# Altium PCB shield_boardPCB.PcbDoc
Units mil, origin at the board's own origin, x right, y up, seen from the top; angles counter-clockwise.
Board outline 2700 x 2100 mil, 2 copper layers (Top Layer, Bottom Layer), stack 62.8 mil thick; 15 components, 31 nets, 60 pads, 20 vias.
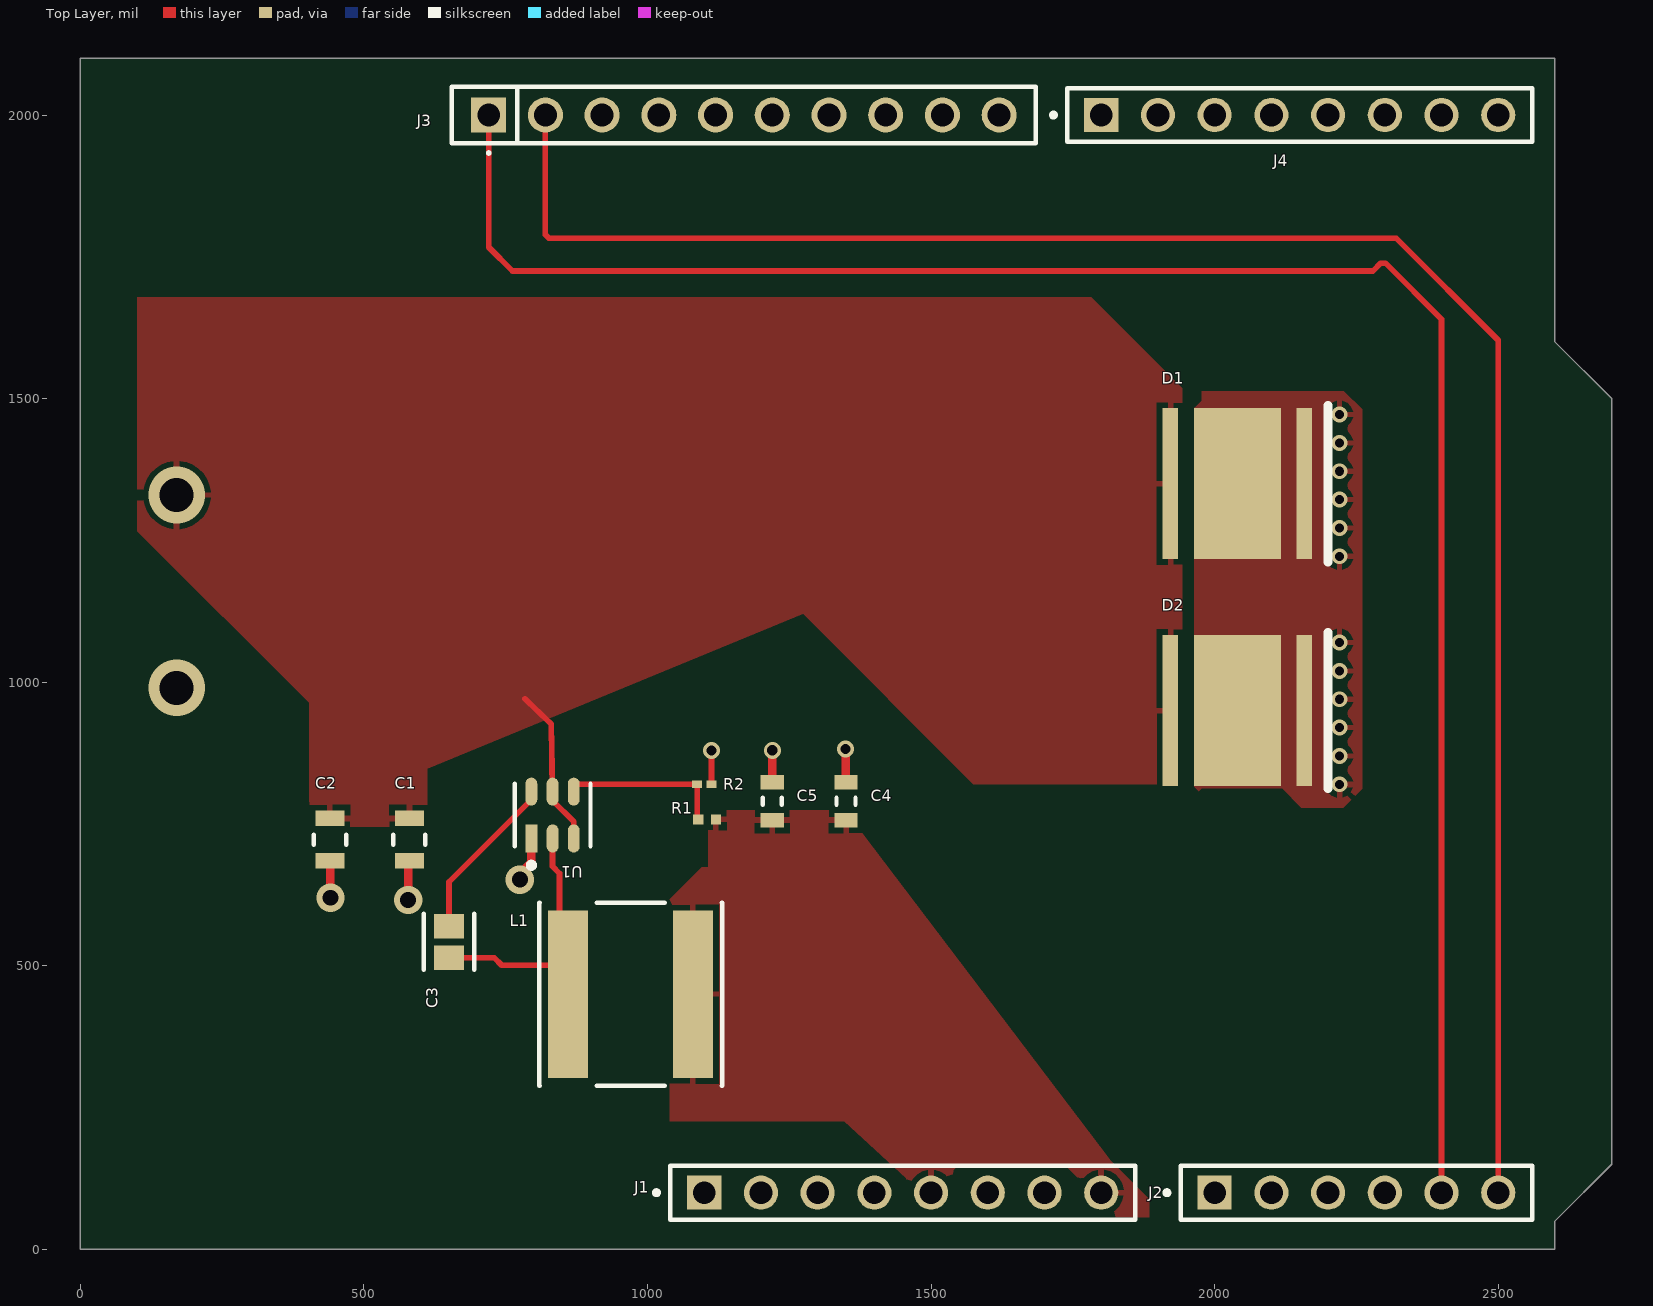
[diagram p0: Top Layer view]
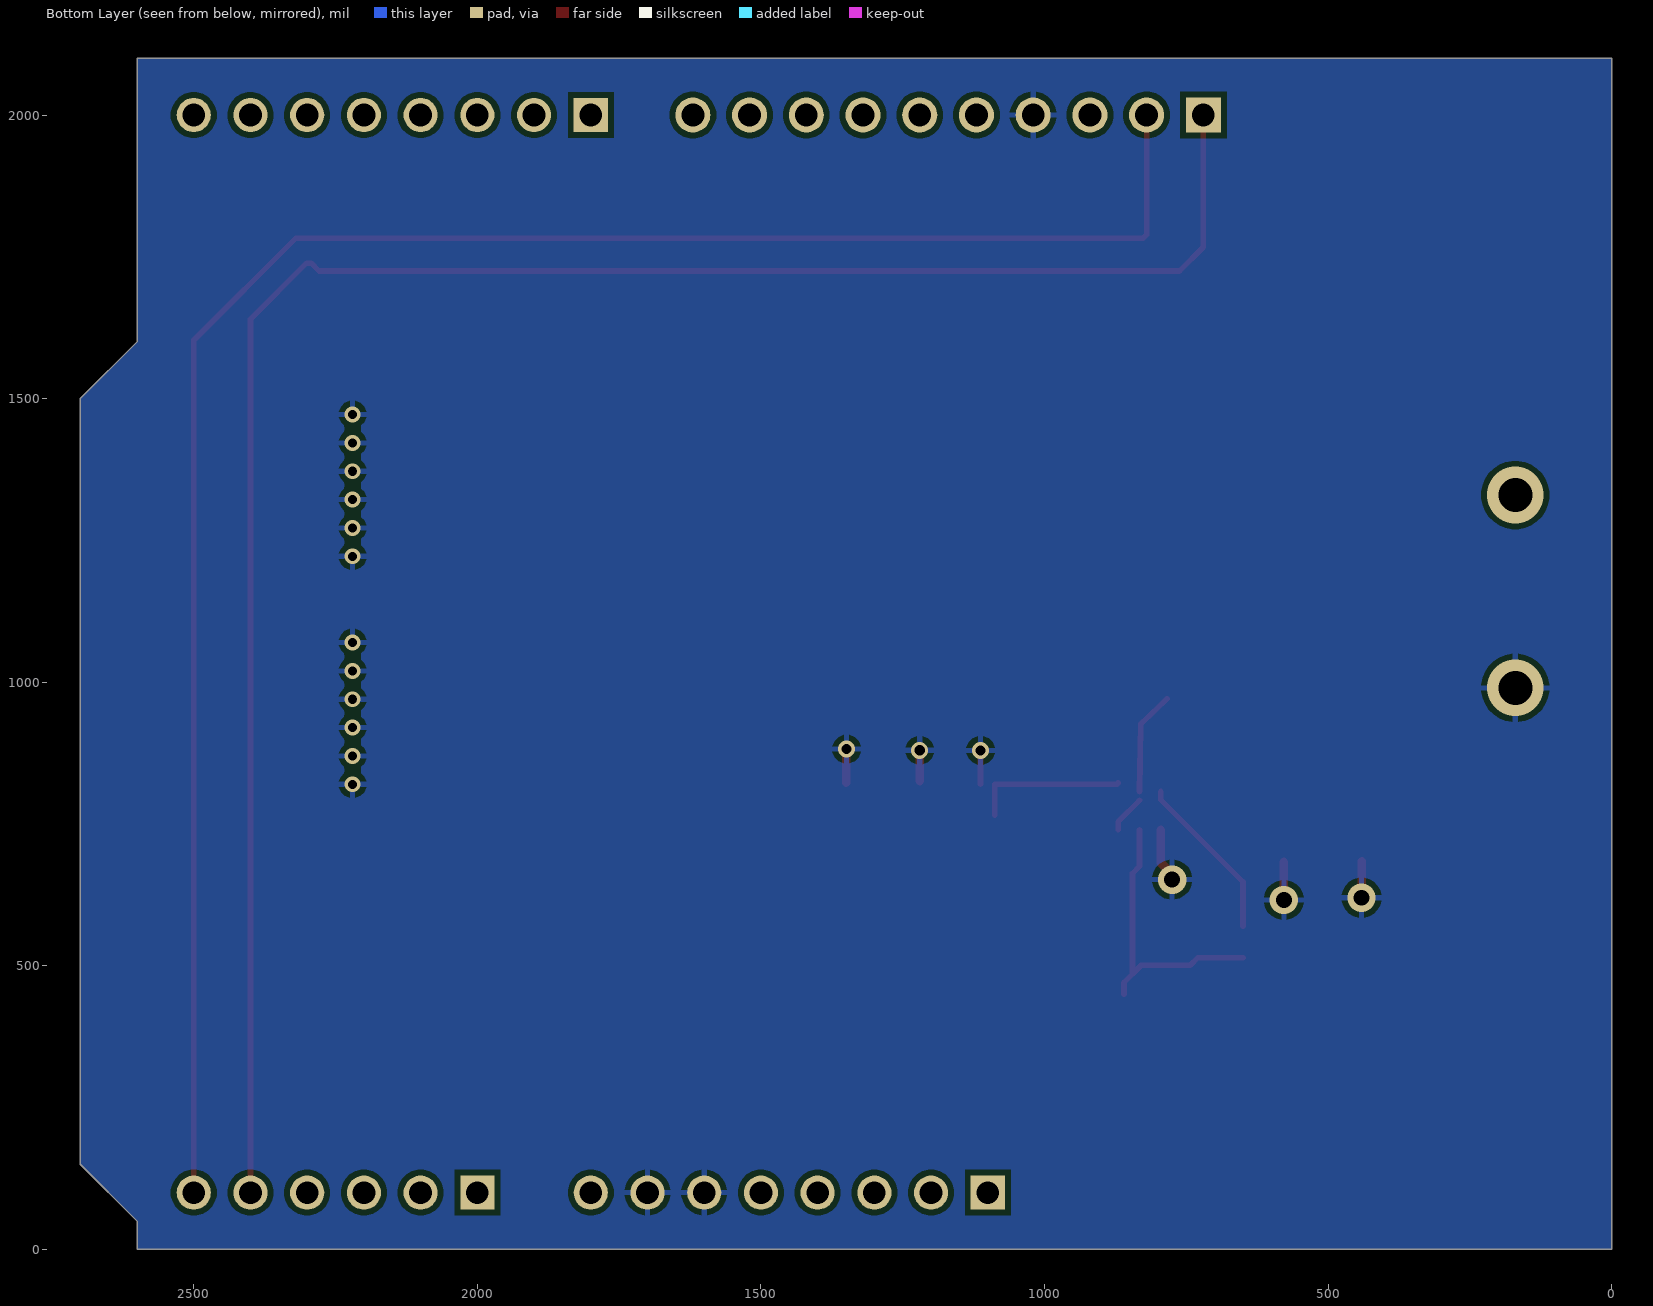
[diagram p1: Bottom Layer view, seen from below]
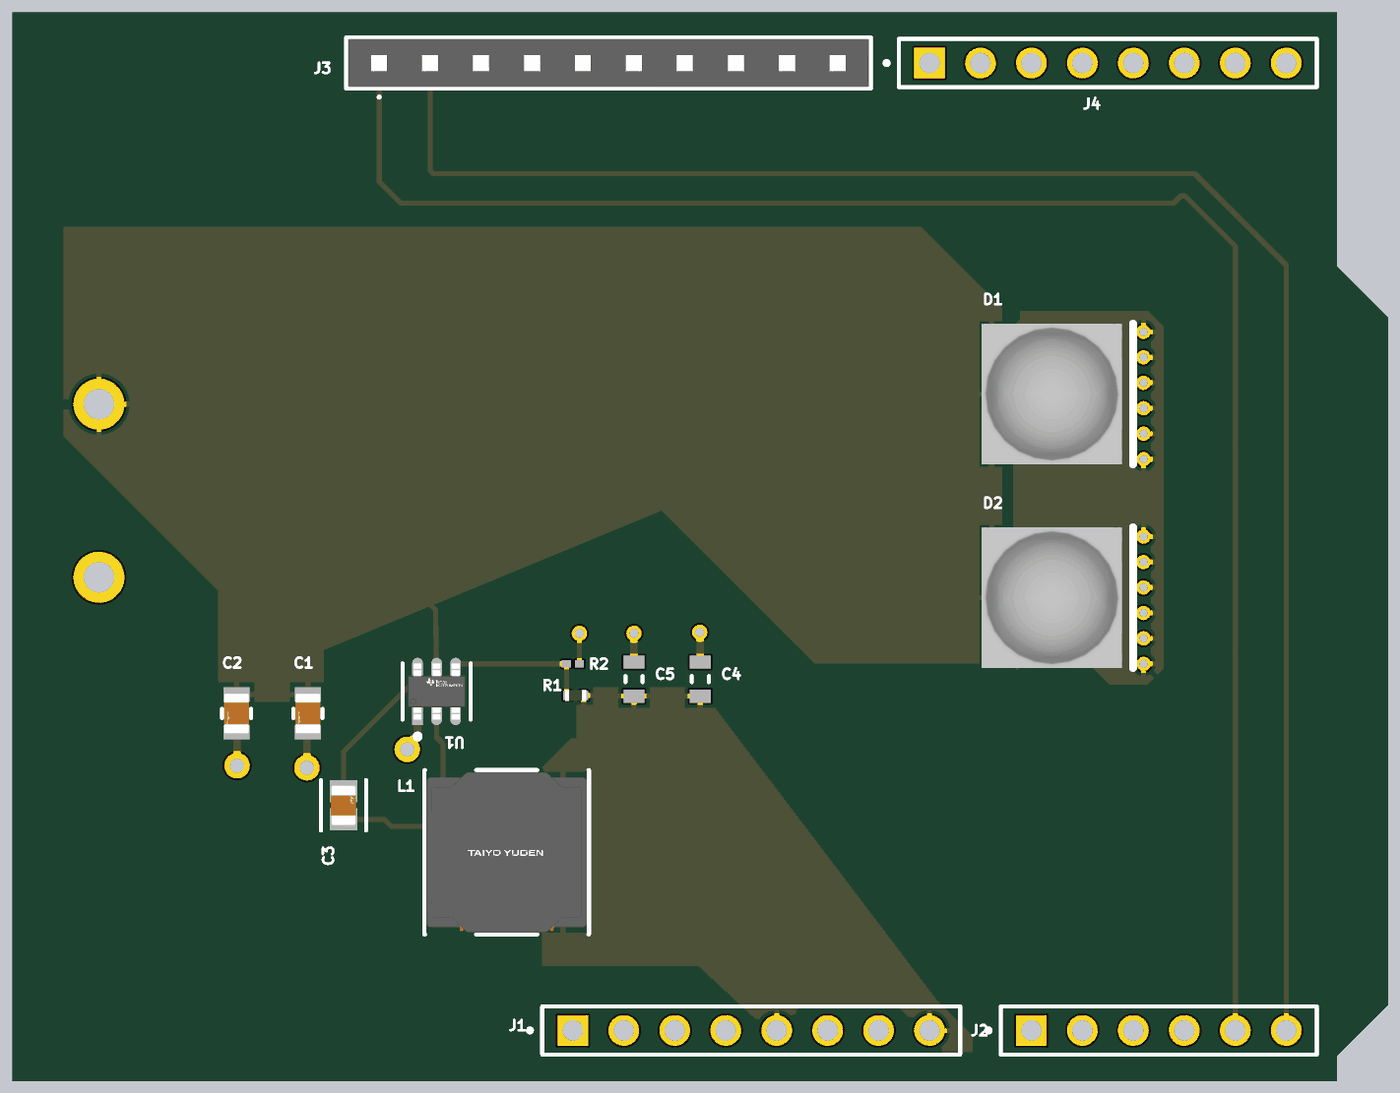
[diagram p2: 3D render of the assembled board from above, using the file's embedded part models]

## Layer stack, top to bottom
Top Solder: solder mask 0.4, Solder Resist, Dk 3.5
Top Layer: signal copper 1.4
Dielectric 1: dielectric 60, FR-4, Dk 4.8
Bottom Layer: signal copper 1.4
Bottom Solder: solder mask 0.4, Solder Resist, Dk 3.5

## Board outline
0,0 0,2100 2600,2100 2600,1600 2700,1500 2700,150 2600,50 2600,0

## Design rules (kind name [scope] priority, off if disabled: settings)
Clearance [InNet('+12')] p1: gap=10 ignorepadtopadclearanceinfootprint=TRUE except(5: Region-Region)
PolygonConnect [All] p1: connectstyle=Relief reliefconductorwidth=10 reliefentries=4 polygonreliefangle="90 Angle" airgapwidth=10
RoutingVias [All] p1: holewidth=28 width=50 viastyle="Through Hole" minholewidth=28 minwidth=50 maxholewidth=28 maxwidth=50
SolderMaskExpansion [All] p1: expansion=4 istentingtop=FALSE
SupplyNets "Schematic Supply Nets_2" [InNet('+5')] p1: voltage=0.000
SupplyNets "Schematic Supply Nets_1" [InNet('+12')] p2: voltage=0.000
SupplyNets "Schematic Supply Nets" [InNet('GND')] p3: voltage=0.000
Width [All] p1: maxlimit=40 minlimit=10 preferedwidth=10
30 further rules are at their usual default settings.

## Components (designator, comment, footprint, x,y, rotation, side; value= is the part's Value field where it differs from the comment)
C1 "Cin" FP-GRM21B-0_2-e0_2_0_7-MFG 580,722.6 r270 top
C2 "Cin" FP-GRM21B-0_2-e0_2_0_7-MFG 440,722.6 r270 top
C3 "Cbst" FP-0805-L_2_01_0_2-W_1_25-IPC_C 650,542.21 r90 top
C4 "Cout" CAPC1608X100X20ML10 1350,790 r270 top
C5 "Cout" CAPC1608X100X20ML10 1220,790 r270 top
D1 "MKRAWT-00-0000-0D0HG235H" CREE-MK-R-2_V 2040,1350 r0 top
D2 "MKRAWT-00-0000-0D0HG235H" CREE-MK-R-2_V 2040,950 r0 top
J1 "8-pin header" SAMTEC_SSQ-108-03-X-S 1450,100 r180 top
J2 "1x6 Header" SAMTEC_SSQ-106-03-X-S 2250,100 r180 top
J3 "10-pin Header" FP-SSQ-110-03-T-S-MFG 1170,2000 r0 top
J4 "8-pin Header" SAMTEC_SSQ-108-03-X-S 2150,2000 r180 top
L1 "NRS8030T3R3MJGJ" FP-NRS8030-MFG 970.24,450 r0 top
R1 "Rfbt" RESC1005X40X25LL05T05 1105.25,758 r0 top
R2 "Rbff" RESC0603X28X15NL05T05 1100,820 r180 top
U1 "TPS562201DDCR" FP-DDC0006A-IPC_C 832.6,765.81 r90 top

## Footprints (in the part's own frame and the unit in brackets; to place one, negate y for a bottom-side part, rotate by r counter-clockwise, add the part's x,y. Pads: shape width x height; smd on the part's side, far side on the other; paste and mask are expansions set on the pad)
CAPC1608X100X20ML10 [mm] "Chip Capacitor, 2-Leads, Body 1.70x0.90mm, IPC Low Density"
  rect 0.65x1.05 smd: 1(-0.85,0) 2(0.85,0)
  silkscreen extent -0.15,-0.43 0.15,0.43, body extent -0.85,-0.45 0.85,0.45, height 1
CREE-MK-R-2_V [mm] "SMD, 2-Leads, Body 7x7mm, Thermal Pad 3.9x6.76mm"
  rect 0.7x6.76 smd: 1(-3,0) 2(3,0)
  rect 3.9x6.76 smd: 3(0,0)
  silkscreen extent 4.05,-3.5 4.05,3.5, body extent -3.5,-3.5 3.5,3.5, height 4.1
FP-0805-L_2_01_0_2-W_1_25-IPC_C [mil]
  rect 43.49x53.39 smd paste+0 mask+0: 1(-27.79,0) 2(27.79,0)
  silkscreen extent -50,-44 50,44, body extent -53,-32 53,32, height 10
FP-DDC0006A-IPC_C [mm]
  rect 1.254x0.532 smd paste+0 mask+0: 1(-1.05,0.95)
  rrect100% 1.254x0.532 smd paste+0 mask+0: 2(-1.05,0) 3(-1.05,-0.95) 4(1.05,-0.95) 5(1.05,0) 6(1.05,0.95)
  silkscreen extent -2.37,-1.7 1.4,1.7, body extent -1.78,-1.55 1.78,1.55, height 0.25
FP-GRM21B-0_2-e0_2_0_7-MFG [mm]
  rect 0.7x1.3 smd paste+0 mask+0: 1(-0.95,0) 2(0.95,0)
  silkscreen extent -0.23,-0.72 0.23,0.72, body extent -1.4,-0.82 1.4,0.82, height 0.25
FP-NRS8030-MFG [mm]
  rect 1.8x7.5 smd paste+0 mask+0: 1(-2.8,0) 2(2.8,0)
  silkscreen extent -4.1,-4.1 4.1,4.1, body extent -4.2,-4.2 4.2,4.2, height 0.25
FP-SSQ-110-03-T-S-MFG [mm]
  rect 1.57x1.57 hole 1.02: 1(-11.43,0)
  round 1.57 hole 1.02: 2(-8.89,0) 3(-6.35,0) 4(-3.81,0) 5(-1.27,0) 6(1.27,0) 7(3.81,0) 8(6.35,0) 9(8.89,0) 10(11.43,0)
  silkscreen extent -13.08,-1.76 13.08,1.27, body extent -13.18,-1.37 13.18,1.37, height 0.25
RESC0603X28X15NL05T05 [mm] "Chip Resistor, 2-Leads, Body 0.60x0.30mm, IPC Medium Density"
  rect 0.45x0.35 smd: 1(-0.325,0) 2(0.325,0)
  body extent -0.33,-0.17 0.33,0.18, height 0.28
RESC1005X40X25LL05T05 [mm] "Chip Resistor, 2-Leads, Body 1.05x0.55mm, IPC High Density"
  rect 0.45x0.45 smd: 1(-0.4,0) 2(0.4,0)
  body extent -0.53,-0.28 0.53,0.28, height 0.4
SAMTEC_SSQ-106-03-X-S [mm]
  rect 1.53x1.53 / inner round 1.53 / far side rect 1.53x1.53 hole 1.02: 01(6.35,0)
  round 1.53 hole 1.02: 02(3.81,0) 03(1.27,0) 04(-1.27,0) 05(-3.81,0) 06(-6.35,0)
  silkscreen extent -7.88,-1.2 8.59,1.2
SAMTEC_SSQ-108-03-X-S [mm]
  rect 1.53x1.53 / inner round 1.53 / far side rect 1.53x1.53 hole 1.02: 01(8.89,0)
  round 1.53 hole 1.02: 02(6.35,0) 03(3.81,0) 04(1.27,0) 05(-1.27,0) 06(-3.81,0) 07(-6.35,0) 08(-8.89,0)
  silkscreen extent -10.42,-1.2 11.13,1.2

## Part data
C1 C2: library part CMP-06035-048920-1, "Chip Multilayer Ceramic Capacitors for General Purpose, 0805, 10uF, X5R, 15%, 10%, 35V", Capacitance=10uF, Case Code (Imperial)=0805, Case Code (Metric)=2012, Dielectric=X5R, Max Operating Temperature=85°C, Min Operating Temperature=-55°C, Package Quantity=3000, Tolerance=10%, Voltage Rating=35V, Case/Package=0805, Height=1.25mm, Lead Free="Lead Free", Length=0.079inch, Mount="Surface Mount", Packaging="Tape and Reel", REACH SVHC="No SVHC", Termination=SMD/SMT, Thickness=0.057inch, Voltage Rating (DC)=35V, Weight=0.000335oz, Width=0.049inch
C3: library part CMP-2000-05014-2, "General Purpose Ceramic Capacitor, 0805, 100nF, 10%, X7R, 0.15, 25V", Capacitance=100nF, Case Code (Imperial)=0805, Case Code (Metric)=2012, Dielectric=X7R, Insulation Resistance=100GR, Max Operating Temperature=125°C, Min Operating Temperature=-55°C, Package Quantity=1, Tolerance=10%, Voltage=25V, Case/Package=0805, Construction=Flat, Contact Plating=Tin, Depth=1.25mm, Dissipation Factor=3%, Height=0.94mm, Lead Free="Lead Free", Length=2.01mm, Mount="Surface Mount", Number of Pins=2, Packaging="Tape and Reel", Radiation Hardening=No, REACH SVHC="No SVHC", RoHS Compliant=Yes, Series=-, Termination=SMD/SMT, Thickness=0.037inch, Voltage Rating=25V, Voltage Rating (DC)=25V, Width=0.049inch
C4 C5: library part CMP-2000-05441-1, "Chip Capacitor, 22 uF, +/- 20%, 10 V, -55 to 85 degC, 0603 (1608 Metric), RoHS, Tape and Reel", Capacitance=22µF, Manufacturer=TDK, Operating Temperature=-55degC~85degC, Package / Case=0603(1608Metric), Package Description="2-Pin Surface Mount Device, Body 1.6 x 0.8 mm", Package Reference=603, PCN Part Number=MLCCPartNumberChange30/Nov/2012, Ratings=-, Standard Package=1, Temperature Coefficient=X5R, Tolerance=±20%, Voltage - Rated=10V, Applications=GeneralPurpose, Category=Capacitors, Datasheet URL=http://download.siliconexpert.com/pdfs/2015/4/21/15/54/45/779/tdk_/manual/37024850441143360mlcc_commercial_general_en.pdf, Datasheet Version=Mar-15, Design Resources=20WNon-IsolatedBuckLEDDriverUsingPLLNK460KG, Family=CeramicCapacitors, Features=-, Height - Seated (Max)=-, Kits=445-9014-KIT-ND-KITMLCC100PF-22UF060310-50V, Lead Spacing=-, Lead Style=-, Manufacturer URL=http://www.tdk.com/, Mounting Type=SurfaceMount,MLCC, Online Catalog=CSeries,GeneralPurpose, Other Names=445-9077-1, Packaging=CutTape(CT), Product Training Modules=CSeriesGeneralApplicationsSEAT,CCV,andTVCLDesignToolsGuidetoReplacinganElectrolyticCapacitorwithanMLCC, RoHS Information=RoHSCertificate-MLCC, Series=C, Size / Dimension="0.063\"Lx0.031\"W(1.60mmx0.80mm)", Thickness (Max)="0.035\"(0.90mm)"
D1 D2: library part CMP-2100-00977-1, "LED, White, 12 V, 2-Pin SMD, RoHS, Tape and Reel"
J1 J4: library part SSQ-108-03-X-S, "SSQ - Samtec 2.54mm Square Tail Single Row Socket Strip 8.5mm Profile - Fast Stock", Package=None, Check_prices=https://www.snapeda.com/parts/SSQ-108-03-T-S/Samtec/view-part/?ref=eda, MF=Samtec, MP=SSQ-108-03-T-S, SnapEDA_Link=https://www.snapeda.com/parts/SSQ-108-03-T-S/Samtec/view-part/?ref=snap
J2: library part SSQ-106-03-X-S, "SSQ - Samtec 2.54mm Square Tail Single Row Socket Strip 8.5mm Profile - Fast Stock", Package=None, Check_prices=https://www.snapeda.com/parts/SSQ-106-03-T-S/Samtec+Inc./view-part/?ref=eda, MF="Samtec Inc.", MP=SSQ-106-03-T-S, SnapEDA_Link=https://www.snapeda.com/parts/SSQ-106-03-T-S/Samtec+Inc./view-part/?ref=snap
J3: library part CMP-00575-00295916-2, "SSQ-110-03-T-S Headers & Wire Housings Tiger Buy Socket Strip with Square Tails, 0.100 Pitch", Color=Black, Current Rating=6.3A, Manufacturer Lifecycle Status=PRODUCTION, Max Operating Temperature=105°C, Min Operating Temperature=-55°C, Voltage Rating=655V, Voltage Rating (AC)=465V, Connector Type="Receptacle, Socket", Contact Material="Nickel, Tin", Contact Plating=Tin, Height=8.64mm, Housing Color=Black, Housing Material=Plastic, Lead Free="Lead Free", Length=25.9mm, Lifecycle Status=Production, Mount="Through Hole", Number of Contacts=10, Number of Pins=10, Number of Positions=10, Number of Rows=1, Packaging=Bulk, Pitch=2.54mm, Radiation Hardening=No, RoHS=Compliant, Termination=Solder, Voltage Rating (DC)=655V, Width=2.41mm
L1: library part CMP-14484-000405-1, "Inductor Power Shielded Wirewound 3.3uH 20% 100KHz Ferrite 4.2A 24.7mΩ DCR T/R", Case/Package=Nonstandard, Current Rating=4.3A, DC Resistance (DCR)=19mR, Inductance=3.3uH, Inductance Tolerance=20%, Max DC Current=4.2A, Max Operating Temperature=125°C, Min Operating Temperature=-25°C, Package Quantity=1000, Resistor Type=Wirewound, Self Resonant Frequency=50MHz, Test Frequency=100kHz, Core Material=Ferrite, Depth=8.2mm, Halogen Free="Halogen Free", Height=3mm, Height - Seated (Max)=0.118inch, Lead Free="Lead Free", Lead Pitch=5.6mm, Length=8mm, Mount="Surface Mount", Number of Pins=2, Packaging="Tape and Reel", Radiation Hardening=No, REACH SVHC="No SVHC", RMS Current (Irms)=4.3A, RoHS Compliant=Yes, Saturation Current=4.2A, Series=NRS, Shielding=Shielded, Termination=SMD/SMT, Tolerance=20%, Width=0.315inch
R1: library part CMP-2000-07588-1, "Chip Resistor, 10 KOhm, +/- 1%, 0.1 W, -55 to 155 degC, 0402 (1005 Metric), RoHS, Tape and Reel", Case Code (Imperial)=0402, Case Code (Metric)=1005, Manufacturer=Panasonic, Max Operating Temperature=155degC, Max Power Dissipation=100mW, Min Operating Temperature=-55degC, Package Description="2-Pin Surface Mount Device, Body 1 x 0.5 mm", Package Quantity=1, Package Reference=402, Resistance=10KOhm, Temperature Coefficient=100ppm\/degreesC, Tolerance=1%, Voltage Rating=50V, Case\/Package=0402, Composition=ThickFilm, Contact Plating=Tin, Datasheet URL=https://industrial.panasonic.com/cdbs/www-data/pdf/RDA0000/AOA0000C304.pdf, Datasheet Version=02/2017, Depth=0.5mm, Height=0.35mm, Lead Free=LeadFree, Length=1mm, Manufacturer URL=http://www.panasonic.com/, Military Standard=Not, Mount=SurfaceMount, Mounting Technology=SurfaceMount, Number of Pins=2, Number of Terminations=2, Packaging=TapeandReel, Power Rating=100mW, Radiation Hardening=No, REACH SVHC=NoSVHC, RoHSCompliant=True, Termination=SMD/SMT, Voltage Rating (DC)=50V, Width=0.02inch
R2: library part CMP-2004-00723-1, Manufacturer="Vishay Dale", Part Number=CRCW020156K2FNED
U1: library part CMP-04918-000361-1, "IC REG BUCK ADJ 2A TSOT23-6", Case/Package=SOT, Max Input Voltage=17V, Max Operating Temperature=125°C, Max Output Current=2A, Min Input Voltage=4.5V, Min Operating Temperature=-40°C, Output Voltage=7V, Quiescent Current=400uA, Switching Frequency=580kHz, Contact Plating=Tin, Lead Free="Lead Free", Mount="Surface Mount", Number of Outputs=1, Number of Pins=6, Operating Supply Voltage=17V, Output Type=Adjustable, RoHS Compliant=Yes

## Via types
v1: diameter 28, hole 16, Top Layer to Bottom Layer, 12 vias
v2: diameter 50, hole 28, Top Layer to Bottom Layer, 3 vias
v3: diameter 30, hole 18, Top Layer to Bottom Layer, 3 vias
v4: diameter 100, hole 60, Top Layer to Bottom Layer, 2 vias

## Nets (pads, with @x,y where several pads share a name; then routed paths per layer and width w, separated by ;. In a path a pad name is that pad's centre, name@x,y a point inside that pad or via, vN(x,y) a via of type N, cw(c..) or ccw(c..) an arc to the next point about the centre after c; other vN are vias at no path point)
3.3V: J1.04
+5: C4.2 C5.2 J1.05 J1.08 L1.2 R1.2
+12: C1.1 C2.1 D1.1 D2.1 U1.3 U1.5 | length 250.7
  Top Layer w10: 784,971 827.42,929.15 827.49,929.08 830.41,926.16 U1.5 ; U1.5@832.6,791.62 870,754.22 U1.3@870,740
  other v4: 170,1330
A0: J2.01
A1: J2.02
A2: J2.03
A3: J2.04
A4: J2.05 J3.1 | length 3517.1
  Top Layer w10: J3.1 720,1767 762,1725 2279,1725 2292.86,1738.86 2301.14,1738.86 2400,1640 J2.05
A5: J2.06 J3.2 | length 3471.1
  Top Layer w10: J3.2 820,1788.86 825.86,1783 2320,1783 2500,1603 J2.06
AREF: J3.3
D0: J4.08
D1: J4.07
D2: J4.06
D3: J4.05
D4: J4.04
D5: J4.03
D6: J4.02
D7: J4.01
D8: J3.10
D9: J3.9
D10: J3.8
D11: J3.7
D12: J3.6
D13: J3.5
GND: C1.2 C2.2 C4.1 C5.1 D1.2 D1.3 D2.2 D2.3 J1.06 J1.07 J3.4 R2.1 U1.1 | length 411.4
  Top Layer w10: C2.2 C2.2@441,684.2 ; C1.2@578,683.2 C1.2 ; R2.1 v3(1112.8,879.8)
  Top Layer w15: v2(441,620) C2.2@441,684.2 ; v2(578,616) C1.2@578,683.2 ; v2(775,652) 775,661.47 795.2,681.67 U1.1@795.2,740 ; C5.1@1219.8,825 v3@1219.8,884.8 ; C4.1@1349.8,823 v3@1349.8,882.8
  other v1: 2220,820 2220,870 2220,920 2220,970 2220,1020 2220,1070 2220,1222 2220,1272 2220,1322 2220,1372 2220,1422 2220,1472
  other v3: 1220,880 1349,882
  other v4: 170,990
IOREF: J1.02
N-C: J1.01
NetC3_2: C3.2 U1.6 | length 297.3
  Top Layer w10: C3.2 650,647.75 795.2,792.94 U1.6
NetR1_1: R1.1 R2.2 U1.4 | length 272.7
  Top Layer w10: U1.4@870,822.7 872.7,820 R2.2 1087.6,819.6 1087.6,766.4 R1.1@1088,766
RESET: J1.03
SW_OUT: C3.1 L1.1 U1.2 | length 508.3
  Top Layer w10: C3.1 729.57,514.43 743,501 829.57,501 860,470.57 L1.1 ; U1.2@832.6,740 832.6,675.4 845,663 L1.1@845,485.57

## Polygon pours and split planes (outlines as drawn)
+5 on Top Layer "+5_L01_P028" (solid, pour order 28): 1371,744 1370,745 1370,774 1110.43,774 1105.25,768.83 1107,767.08 1107,674 1096,674 1023,601 1039,585 1039,226 1347,226 1456,125 1456,65 1487,34 1513,60 1532,60 1532,68 1542,78 1541,79 1541,136 1538,139 1546,147 1738,147 1760,125 1760,95 1776,79 1776,63 1768,55 1746,77 1746,94 1794,46 1805,57 1885,57 1885,88 1817,156
+12 on Top Layer "+12_L01_P018" (solid, pour order 18): 611.69,847.14 611.69,747.48 613.69,745.48 403.69,745.48 403.69,963.48 100.69,1266.48 100.69,1678.48 1782.69,1678.48 1942.69,1518.48 1942.69,820.48 1574.69,820.48 1274.31,1120.86
GND on Top Layer "GND_L01_P009" (solid, pour order 9): 1964,816 1972,808 1977,813 2119,813 2153,779 2227,779 2260,812 2260,1481 2228,1513 1977,1513 1977,1496 1965,1484 1964,1484
GND on Bottom Layer "GND_L02_P000" (solid, pour order 0): 2600,0 2600,50 2700,150 2700,1500 2600,1600 2600,2100 0,2100 0,0